# EAGLE board CT_schematic (EAGLE 7.6.0)

Size 100 x 80 mm. Coordinates in mm from the lower left corner, seen from the top.
Outline: 0,0 100,0 100,80 0,80 0,0
Copper layers (1*16): Top 0.035mm / dielectric 1.5mm / Bottom 0.035mm
Design rules "default": minimum track width 10mil, minimum drill 24mil, track to track 8mil, track to pad 8mil, pad to pad 8mil, via to via 8mil, smd to smd 8mil, copper to edge 40mil, drill to drill 8mil, minimum pad ring 10mil, minimum via ring 8mil, stop-mask expansion 4mil, vias tented up to drill 0mil, thermal gap 10mil

## Footprints (pad centres in the part's own frame; a part is rotated, then mirrored left to right if it is on the bottom)
C0603 = smd 0.8 x 0.8: 1 -0.762,0; 2 0.762,0
C0402 = smd 0.5 x 0.5: 1 -0.508,0; 2 0.508,0
C1210 = smd 1.2 x 2.5: 1 -1.524,0; 2 1.524,0
EXV-9H = smd 3.505 x 1.676: 1 -2.857,0; 2 2.857,0
PJ-037B_PACKAGE = drill 3.7 square: 1 12,0 | drill 3.2 square: 2 6,0
R0603 = smd 0.8 x 0.8: 1 -0.762,0; 2 0.762,0
UFBGA100 = smd 0.28 x 0.28: A1 -2.75,2.75; A2 -2.25,2.75; A3 -1.75,2.75; A4 -1.25,2.75; A5 -0.75,2.75; A6 -0.25,2.75; A7 0.25,2.75; A8 0.75,2.75; A9 1.25,2.75; A10 1.75,2.75; A11 2.25,2.75; A12 2.75,2.75; B1 -2.75,2.25; B2 -2.25,2.25; B3 -1.75,2.25; B4 -1.25,2.25; B5 -0.75,2.25; B6 -0.25,2.25; B7 0.25,2.25; B8 0.75,2.25; B9 1.25,2.25; B10 1.75,2.25; B11 2.25,2.25; B12 2.75,2.25; C1 -2.75,1.75; C2 -2.25,1.75; C3 -1.75,1.75; C4 -1.25,1.75; C5 -0.75,1.75; C8 0.75,1.75; C9 1.25,1.75; C10 1.75,1.75; C11 2.25,1.75; C12 2.75,1.75; D1 -2.75,1.25; D2 -2.25,1.25; D3 -1.75,1.25; D10 1.75,1.25; D11 2.25,1.25; D12 2.75,1.25; E1 -2.75,0.75; E2 -2.25,0.75; E3 -1.75,0.75; E10 1.75,0.75; E11 2.25,0.75; E12 2.75,0.75; F1 -2.75,0.25; F2 -2.25,0.25; F11 2.25,0.25; F12 2.75,0.25; G1 -2.75,-0.25; G2 -2.25,-0.25; G11 2.25,-0.25; G12 2.75,-0.25; H1 -2.75,-0.75; H2 -2.25,-0.75; H3 -1.75,-0.75; H10 1.75,-0.75; H11 2.25,-0.75; H12 2.75,-0.75; J1 -2.75,-1.25; J2 -2.25,-1.25; J3 -1.75,-1.25; J10 1.75,-1.25; J11 2.25,-1.25; J12 2.75,-1.25; K1 -2.75,-1.75; K2 -2.25,-1.75; K3 -1.75,-1.75; K4 -1.25,-1.75; K5 -0.75,-1.75; K8 0.75,-1.75; K9 1.25,-1.75; K10 1.75,-1.75; K11 2.25,-1.75; K12 2.75,-1.75; L1 -2.75,-2.25; L2 -2.25,-2.25; L3 -1.75,-2.25; L4 -1.25,-2.25; L5 -0.75,-2.25; L6 -0.25,-2.25; L7 0.25,-2.25; L8 0.75,-2.25; L9 1.25,-2.25; L10 1.75,-2.25; L11 2.25,-2.25; L12 2.75,-2.25; M1 -2.75,-2.75; M2 -2.25,-2.75; M3 -1.75,-2.75; M4 -1.25,-2.75; M5 -0.75,-2.75; M6 -0.25,-2.75; M7 0.25,-2.75; M8 0.75,-2.75; M9 1.25,-2.75; M10 1.75,-2.75; M11 2.25,-2.75; M12 2.75,-2.75
SOIC-8 = smd 1.6 x 0.6: 1 -2.7,1.905 | smd 1.55 x 0.6: 2 -2.7,0.635; 3 -2.7,-0.635; 4 -2.7,-1.905; 5 2.7,-1.905; 6 2.7,-0.635; 7 2.7,0.635; 8 2.7,1.905
USB-A-H = drill 0.914: 1 2.718,3.493; 2 2.718,1.003; 3 2.718,-1.003; 4 2.718,-3.493 | drill 2.311: 5 0,-6.566; 6 0,6.566
SOT143B = smd 1 x 0.7: 1 -0.75,-1 | smd 0.6 x 0.7: 2 0.95,-1; 3 0.95,1; 4 -0.95,1
ABS07-32.768KHZ-7-T = smd 1.1 x 2.4: 1 -2.5,0; 2 0,0
ASFL1 = smd 1.7 x 1.5: 1 -1.27,-1.1; 2 1.27,-1.1; 3 1.27,1.1; 4 -1.27,1.1
SOIC-8_EP = smd 1.6 x 0.533: 1 -2.921,1.905; 2 -2.921,0.635; 3 -2.921,-0.635; 4 -2.921,-1.905; 5 2.921,-1.905; 6 2.921,-0.635; 7 2.921,0.635; 8 2.921,1.905 | smd 2.54 x 3.302: EPAD 0,0 | drill 0.406 pad 0.406: P$1 -0.508,0.635; P$2 0.381,0.635; P$3 -0.508,-0.635; P$4 0.381,-0.635
SON-6 = smd 0.55 x 0.3: 1 -0.355,0.5 | smd 0.52 x 0.3: 2 -0.37,0; 3 -0.37,-0.5; 4 0.37,-0.5; 5 0.37,0; 6 0.37,0.5
SW_4-1437565-2 = smd 1.4 x 2.1: 1 -2.23,4.55; 2 -2.23,-4.55; 3 2.23,4.55; 4 2.23,-4.55
LGM67K-G1J2-24-Z = smd 0.8 x 1.4: A -2,0; C 0,0
NC7SZ125M5X = smd 1.3 x 0.7: 1 -1.3,0.95; 2 -1.3,0; 3 -1.3,-0.95; 4 1.3,-0.95; 5 1.3,0.95
DUMMY_PACKAGE_104 = drill 0.3: 1 0,-1; 2 1.5,-1; 3 3,-1

## Placement (x,y rotation side)
C1  1e-06  [C0603]  -43.18,55.88 0 top  (outside the outline)
C2  1e-07  [C0603]  -46.99,55.88 0 top  (outside the outline)
C3  1e-07  [C0603]  -50.8,55.88 0 top  (outside the outline)
C4  1e-07  [C0603]  -54.61,55.88 0 top  (outside the outline)
C5  1e-07  [C0603]  -58.42,55.88 0 top  (outside the outline)
C6  1e-07  [C0603]  -15.24,60.96 0 top  (outside the outline)
C7  1e-07  [C0603]  -19.05,60.96 0 top  (outside the outline)
C8  4.7e-06  [C0603]  -39.37,55.88 0 top  (outside the outline)
C9  1e-07  [C0603]  -22.86,60.96 0 top  (outside the outline)
C10  1e-08  [C0603]  -26.67,60.96 0 top  (outside the outline)
C11  1e-06  [C0603]  -30.48,60.96 0 top  (outside the outline)
C12  1e-11  [C0402]  -49.53,60.96 0 top  (outside the outline)
C13  1e-11  [C0402]  -53.34,60.96 0 top  (outside the outline)
C14  1e-08  [C0402]  -57.15,60.96 0 top  (outside the outline)
C15  1e-08  [C0402]  -60.96,60.96 0 top  (outside the outline)
C16  1e-05  [C1210]  -57.15,41.91 0 top  (outside the outline)
C17  1e-05  [C1210]  -16.51,49.53 0 top  (outside the outline)
C18  1e-05  [C1210]  -22.86,49.53 0 top  (outside the outline)
C19  1e-05  [C1210]  -29.21,49.53 0 top  (outside the outline)
C20  1e-07  [C0402]  -15.24,66.04 0 top  (outside the outline)
C21  0.0001  [EXV-9H]  -35.56,34.29 0 top  (outside the outline)
C22  0.0001  [EXV-9H]  -46.99,34.29 0 top  (outside the outline)
C23  1e-08  [C0402]  -19.05,66.04 0 top  (outside the outline)
J1  PJ-037B  [PJ-037B_PACKAGE]  -44.45,7.62 0 top  (outside the outline)
R2  1000.0  [R0603]  -34.29,60.96 0 top  (outside the outline)
R4  4700.0  [R0603]  -38.1,60.96 0 top  (outside the outline)
R5  10000.0  [R0603]  -59.69,49.53 0 top  (outside the outline)
R6  10000.0  [R0603]  -15.24,55.88 0 top  (outside the outline)
R7  10000.0  [R0603]  -20.32,55.88 0 top  (outside the outline)
R8  10000.0  [R0603]  -25.4,55.88 0 top  (outside the outline)
R9  4031.5447154472  [R0603]  -44.45,49.53 0 top  (outside the outline)
R10  2200.0  [R0603]  -41.91,60.96 0 top  (outside the outline)
R11  10000.0  [R0603]  -30.48,55.88 0 top  (outside the outline)
R12  10000.0  [R0603]  -35.56,55.88 0 top  (outside the outline)
R13  9100.0  [R0603]  -45.72,60.96 0 top  (outside the outline)
R14  680000.0  [R0603]  -49.53,49.53 0 top  (outside the outline)
R15  120000.0  [R0603]  -54.61,49.53 0 top  (outside the outline)
U1  STM32L443VCI6  [UFBGA100]  -44.45,22.86 0 top  (outside the outline)
U2  AT25640B-SSHL-T  [SOIC-8]  -59.69,22.86 0 top  (outside the outline)
U3  61400416021  [USB-A-H]  -19.05,8.89 0 top  (outside the outline)
U4  prtr5v0u2ax  [SOT143B]  -31.75,66.04 0 top  (outside the outline)
U5  ABS07-32.768KHZ-7-T  [ABS07-32.768KHZ-7-T]  -27.94,43.18 0 top  (outside the outline)
U6  ASFL1-25MHZ-NCS  [ASFL1]  -26.67,34.29 0 top  (outside the outline)
U7  MIC5234YME  [SOIC-8_EP]  -36.83,41.91 0 top  (outside the outline)
U8  TPS3895ADRYR  [SON-6]  -40.64,64.77 0 top  (outside the outline)
U9  4-1437565-2  [SW_4-1437565-2]  -27.94,24.13 0 top  (outside the outline)
U10  Q65110A2395  [LGM67K-G1J2-24-Z]  -45.72,41.91 0 top  (outside the outline)
U11  nc7sz125m5x  [NC7SZ125M5X]  -34.29,49.53 0 top  (outside the outline)
U12  Dummy  [DUMMY_PACKAGE_104]  -38.1,66.04 0 top  (outside the outline)

## Library data of the parts
C1-C23 J1 R2 R4-R15 U1-U12 = circuit_tree

## Nets
CLK_CRYSTAL_U1_D1: C12.1 U1.D1 U5.1
CLK_CRYSTAL_U1_E1: C13.1 U1.E1 U5.2
CLK_U1_F1: U1.F1 U6.3
GND: C1.2 C2.2 C3.2 C4.2 C5.2 C6.2 C7.2 C8.2 C9.2 C10.2 C11.2 C12.2 C13.2 C14.2 C15.2 C16.2 C17.2 C18.2 C19.2 C20.2 C21.2 C22.2 C23.2 J1.2 R2.2 R5.2 R10.2 R13.2 R15.2 U1.D3 U1.E3 U1.F2 U1.F11 U1.F12 U1.J1 U1.K1 U2.4 U3.4 U3.5 U3.6 U4.1 U6.2 U7.7 U7.EPAD U8.2 U10.C U11.1 U11.3 U12.1
NET_U1_A4: R5.1 U1.A4
NET_U1_H2: R4.1 U1.H2 U11.4
NET_U1_M11: U10.A
NET_U1_M12: U9.3 U9.4
NET_U2_3: R6.1 U2.3
NET_U2_7: R8.1 U2.7
NET_U4_4: U3.1 U4.4
NET_U7_4: R9.2 R10.1 U7.4
NET_U8_1: R12.1 R13.1 U8.1
NET_U8_3: R14.2 R15.1 U8.3
NET_U8_4: R11.1 U8.4 U11.2
NET_U9_1: R2.1 U9.1 U9.2
PROC_PE1: U1.A2 U12.3
PROC_PE3: U1.A1 U12.2
PROC_SPI1_MISO: U1.A7 U2.2
PROC_SPI1_MOSI: U1.C5 U2.5
PROC_SPI1_NSS: R7.1 U1.A9 U2.1
PROC_SPI1_SCK: U1.A8 U2.6
PROC_USB_DM: U3.2 U4.3
PROC_USB_DP: U3.3 U4.2
VCC_S1_5V2: C16.1 C17.1 C21.1 C22.1 J1.1 U7.5 U7.8
VCC_TIER1_3V3: C1.1 C2.1 C3.1 C4.1 C5.1 C6.1 C7.1 C8.1 C9.1 C10.1 C11.1 C14.1 C15.1 C18.1 C19.1 C20.1 C23.1 R4.2 R6.2 R7.2 R8.2 R9.1 R11.2 R12.2 R14.1 U1.C4 U1.C11 U1.E2 U1.G2 U1.G11 U1.G12 U1.H3 U1.L1 U1.M1 U2.8 U6.4 U7.1 U8.6 U11.5

## Tracks (layer width: path | path; a pad name or v marks a point on that pad's centre or on a via)
CLK_CRYSTAL_U1_D1  (2 unrouted)
CLK_CRYSTAL_U1_E1  (2 unrouted)
CLK_U1_F1  (1 unrouted)
GND  (48 unrouted)
NET_U1_A4  (1 unrouted)
NET_U1_H2  (2 unrouted)
NET_U1_M12  (1 unrouted)
NET_U2_3  (1 unrouted)
NET_U2_7  (1 unrouted)
NET_U4_4  (1 unrouted)
NET_U7_4  (2 unrouted)
NET_U8_1  (2 unrouted)
NET_U8_3  (2 unrouted)
NET_U8_4  (2 unrouted)
NET_U9_1  (2 unrouted)
PROC_PE1  (1 unrouted)
PROC_PE3  (1 unrouted)
PROC_SPI1_MISO  (1 unrouted)
PROC_SPI1_MOSI  (1 unrouted)
PROC_SPI1_NSS  (2 unrouted)
PROC_SPI1_SCK  (1 unrouted)
PROC_USB_DM  (1 unrouted)
PROC_USB_DP  (1 unrouted)
VCC_S1_5V2  (6 unrouted)
VCC_TIER1_3V3  (38 unrouted)